# Altium PCB AMS1117 3_3V.PcbDoc
Units mil, origin at the board's own origin, x right, y up, seen from the top; angles counter-clockwise.
Board outline 2000 x 725 mil, 2 copper layers (Top Layer, Bottom Layer); 11 components, 8 nets, 49 pads, 4 vias.
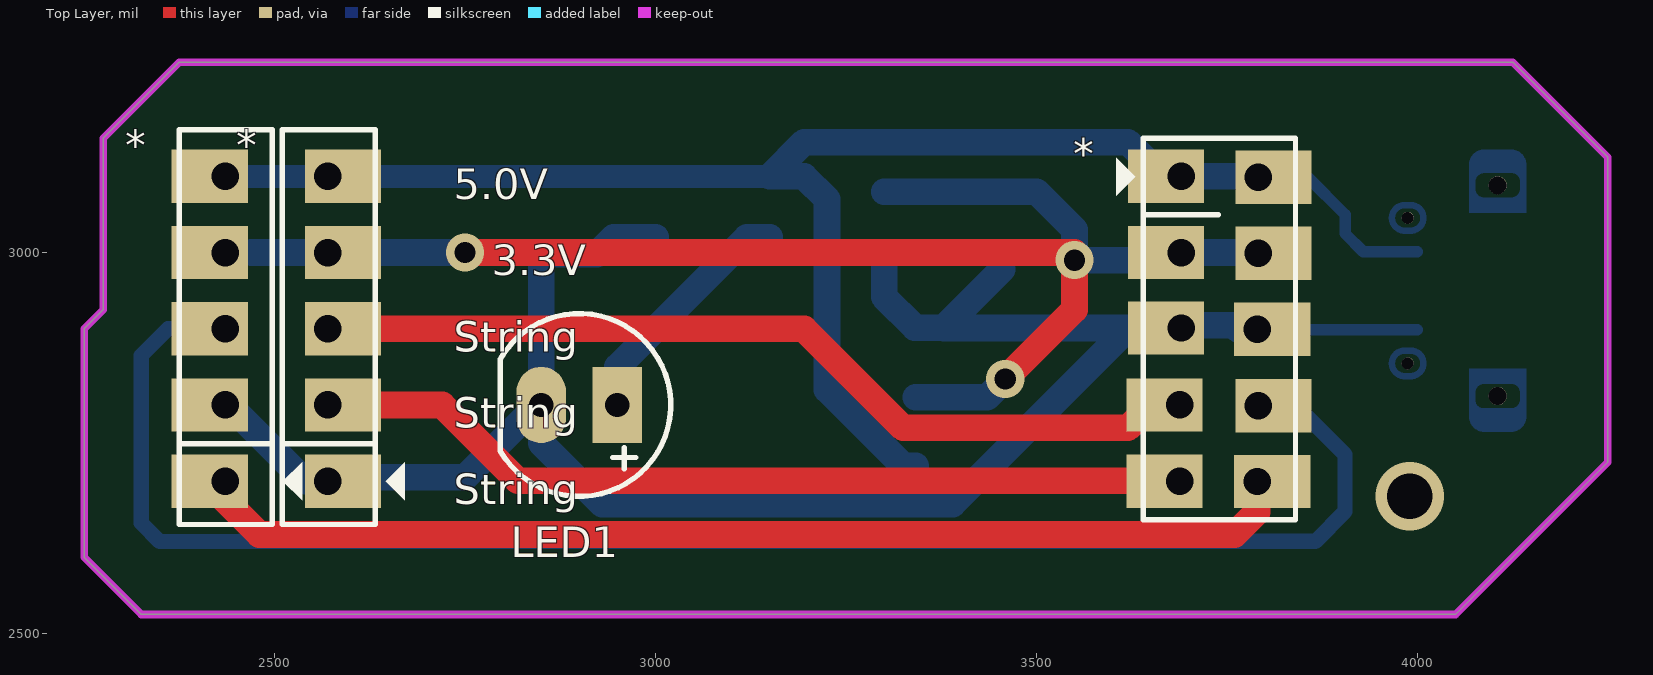
[diagram p0: Top Layer view]
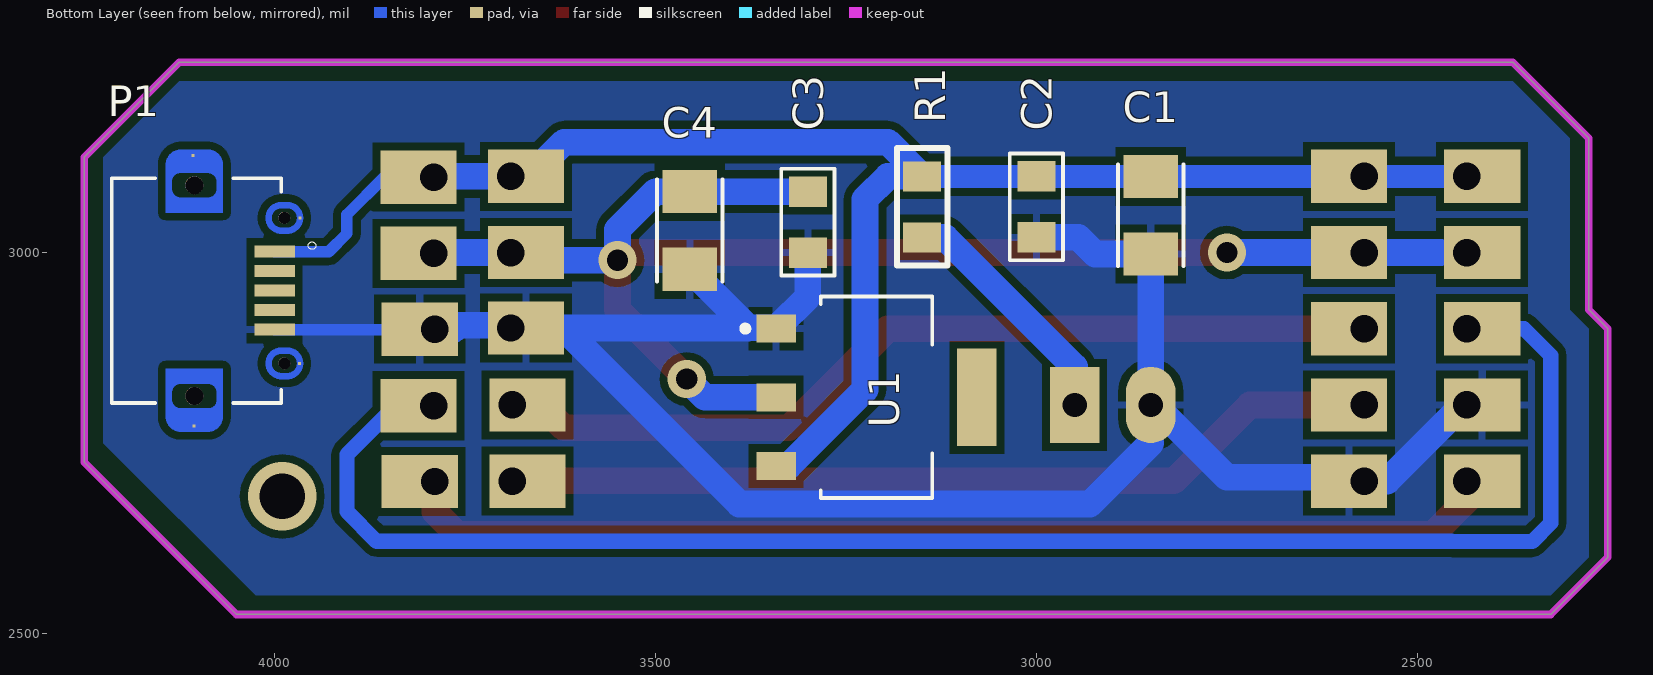
[diagram p1: Bottom Layer view, seen from below]
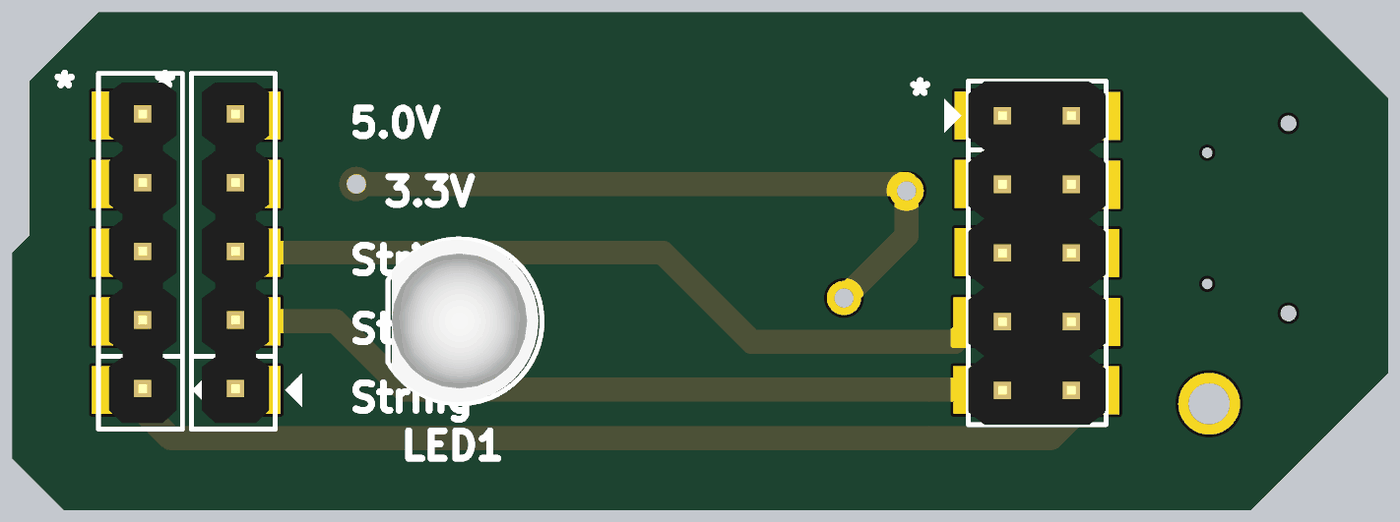
[diagram p2: 3D render of the assembled board from above, using the file's embedded part models]

## Layer stack, top to bottom
Top Solder: solder mask 0.4, Solder Resist, Dk 3.5
Top Layer: signal copper 1.4
Dielectric 1: dielectric 12.6, FR-4, Dk 4.8
Bottom Layer: signal copper 1.4
Bottom Solder: solder mask 0.4, Solder Resist, Dk 3.5

## Board outline
2325,2525 2250,2600 2250,2900 2275,2925 2275,3150 2375,3250 4125,3250 4250,3125 4250,2725 4050,2525

## Design rules (kind name [scope] priority, off if disabled: settings)
Clearance [All] p1: gap=10 ignorepadtopadclearanceinfootprint=FALSE except(0: Arc-Hole Track-Hole SMDPad-Hole THPad-Hole Via-Hole Fill-Hole Poly-Hole Region-Hole Text-Hole)
PolygonConnect [All] p1: connectstyle=Relief reliefconductorwidth=10 reliefentries=4 polygonreliefangle="90 Angle" airgapwidth=10
RoutingVias [All] p1: holewidth=28 width=50 viastyle="Through Hole" minholewidth=28 minwidth=50 maxholewidth=28 maxwidth=50
SolderMaskExpansion [All] p1: expansion=4
Width [All] p1: maxlimit=50 minlimit=15 preferedwidth=35 minimp=50.000000 maximp=50.000000 favimp=50.000000
30 further rules are at their usual default settings.

## Classes and differential pairs
component class "AMS1117 3_3V": * C1 C2 C3 C4 LED1 P1 R1 U1

## Components (designator, comment, footprint, x,y, rotation, side; value= is the part's Value field where it differs from the comment)
* "STM32" JP5#1 2570,2700 r90 top
* "STM8" JP5#2 2435,2700 r90 top
* "JP5X2" JP5X2 3689.5,3099.5 r270 top
C1 "C3216X5R1A106K160AB" CAPC3216X180 2850,3049.02 r270 bottom
C2 "2u2" 0805C-GENERIC 3000,3090 r270 bottom
C3 "2u2" 0805C-GENERIC 3300,3070 r270 bottom
C4 "C3216X5R1A106K160AB" CAPC3216X180 3455,3029.02 r270 bottom
LED1 "LED" LED-5-RED 2950,2800 r180 top
P1 "ZX62D-B-5P8" HRS_ZX62D-B-5P8 4000,2950 r270 bottom
R1 "R0805" "DIEN TRO 0805" 3150,3060 r90 bottom
U1 "AMS1117-3.3" SOT229P700X180-4N 3210,2810 r270 bottom

## Footprints (in the part's own frame and the unit in brackets; to place one, negate y for a bottom-side part, rotate by r counter-clockwise, add the part's x,y. Pads: shape width x height; smd on the part's side, far side on the other; paste and mask are expansions set on the pad)
0805C-GENERIC [mil] "CAPACITOR 0805"
  rect 40x50 smd: 1(-10,0) 2(70,0)
  silkscreen extent -40,-35 100,35, body extent -11,-25 70,25, height 26
CAPC3216X180 [mm]
  rect 1.44x1.82 smd: 1(-1.295,0) 2(1.295,0)
  silkscreen extent -1.7,-1.09 1.7,1.09
"DIEN TRO 0805" [mil] "Chip Resistor; Body 2.0 x 1.3 mm (LxW typ)"
  rect 39.37x50 smd: 1(-40,0) 2(40,0)
  silkscreen extent -77,-33 77,33, body extent -39,-25 39,25, height 31
HRS_ZX62D-B-5P8 [mm]
  rect 0.4x1.35 smd: 1(-1.3,0) 2(-0.65,0) 3(0,0) 4(0.65,0) 5(1.3,0)
  round 0.6 hole 0.6 unplated: None(-3.513,-2.675) None(3.513,-2.675)
  round 0.4 hole 0.4 unplated: None(-2.425,0.325) None(2.425,0.325)
  rect 0.1x0.1 smd: P1(-2.425,0.85) P2(2.425,0.837) P3(-4.513,-2.713) P6(4.513,-2.688)
  Top Layer region: 3.1,-2.675 2.6,-2.675 2.6,-1.725 4.213,-1.725 4.239,-1.726 4.265,-1.729 4.291,-1.733 4.317,-1.739 4.342,-1.745 4.367,-1.754 4.391,-1.763 4.415,-1.774 4.439,-1.785 4.461,-1.799 4.483,-1.813 4.504,-1.828 4.525,-1.845 4.544,-1.862 4.563,-1.881 4.58,-1.9 4.597,-1.921 4.612,-1.942 4.626,-1.964 4.64,-1.986 4.651,-2.01 4.662,-2.034 4.671,-2.058 4.68,-2.083 4.686,-2.108 4.692,-2.134 4.696,-2.16 4.699,-2.186 4.7,-2.212 4.7,-2.675 3.925,-2.675 3.925,-2.193 3.924,-2.178 3.923,-2.164 3.92,-2.15 3.917,-2.136 3.914,-2.122 3.909,-2.108 3.904,-2.095 3.898,-2.082 3.892,-2.069 3.885,-2.056 3.877,-2.044 3.868,-2.033 3.859,-2.021 3.85,-2.011 3.839,-2 3.829,-1.991 3.817,-1.982 3.806,-1.973 3.794,-1.965 3.781,-1.958 3.768,-1.952 3.755,-1.946 3.742,-1.941 3.728,-1.936 3.714,-1.933 3.7,-1.93 3.686,-1.927 3.672,-1.926 3.657,-1.925 3.392,-1.925 3.376,-1.926 3.361,-1.927 3.345,-1.93 3.33,-1.933 3.315,-1.937 3.3,-1.942 3.285,-1.948 3.271,-1.954 3.257,-1.961 3.243,-1.969 3.23,-1.978 3.217,-1.987 3.205,-1.997 3.193,-2.007 3.182,-2.018 3.172,-2.03 3.162,-2.042 3.153,-2.055 3.144,-2.068 3.136,-2.082 3.129,-2.096 3.123,-2.11 3.117,-2.125 3.112,-2.14 3.108,-2.155 3.105,-2.17 3.102,-2.186 3.101,-2.201 3.1,-2.217
  Top Layer region: -3.1,-2.675 -2.6,-2.675 -2.6,-3.625 -4.213,-3.625 -4.239,-3.624 -4.265,-3.621 -4.291,-3.617 -4.317,-3.611 -4.342,-3.605 -4.367,-3.596 -4.391,-3.587 -4.415,-3.576 -4.439,-3.565 -4.461,-3.551 -4.483,-3.537 -4.504,-3.522 -4.525,-3.505 -4.544,-3.488 -4.563,-3.469 -4.58,-3.45 -4.597,-3.429 -4.612,-3.408 -4.626,-3.386 -4.64,-3.364 -4.651,-3.34 -4.662,-3.316 -4.671,-3.292 -4.68,-3.267 -4.686,-3.242 -4.692,-3.216 -4.696,-3.19 -4.699,-3.164 -4.7,-3.138 -4.7,-2.675 -3.925,-2.675 -3.925,-3.157 -3.924,-3.172 -3.923,-3.186 -3.92,-3.2 -3.917,-3.214 -3.914,-3.228 -3.909,-3.242 -3.904,-3.255 -3.898,-3.268 -3.892,-3.281 -3.885,-3.294 -3.877,-3.306 -3.868,-3.317 -3.859,-3.329 -3.85,-3.339 -3.839,-3.35 -3.829,-3.359 -3.817,-3.368 -3.806,-3.377 -3.794,-3.385 -3.781,-3.392 -3.768,-3.398 -3.755,-3.404 -3.742,-3.409 -3.728,-3.414 -3.714,-3.417 -3.7,-3.42 -3.686,-3.423 -3.672,-3.424 -3.657,-3.425 -3.392,-3.425 -3.376,-3.424 -3.361,-3.423 -3.345,-3.42 -3.33,-3.417 -3.315,-3.413 -3.3,-3.408 -3.285,-3.402 -3.271,-3.396 -3.257,-3.389 -3.243,-3.381 -3.23,-3.372 -3.217,-3.363 -3.205,-3.353 -3.193,-3.343 -3.182,-3.332 -3.172,-3.32 -3.162,-3.308 -3.153,-3.295 -3.144,-3.282 -3.136,-3.268 -3.129,-3.254 -3.123,-3.24 -3.117,-3.225 -3.112,-3.21 -3.108,-3.195 -3.105,-3.18 -3.102,-3.164 -3.101,-3.149 -3.1,-3.133
  Top Layer region: 2.6,-3.625 4.213,-3.625 4.239,-3.624 4.265,-3.621 4.291,-3.617 4.317,-3.611 4.342,-3.605 4.367,-3.596 4.391,-3.587 4.415,-3.576 4.439,-3.565 4.461,-3.551 4.483,-3.537 4.504,-3.522 4.525,-3.505 4.544,-3.488 4.563,-3.469 4.58,-3.45 4.597,-3.429 4.612,-3.408 4.626,-3.386 4.64,-3.364 4.651,-3.34 4.662,-3.316 4.671,-3.292 4.68,-3.267 4.686,-3.242 4.692,-3.216 4.696,-3.19 4.699,-3.164 4.7,-3.138 4.7,-2.675 3.925,-2.675 3.925,-3.133 3.924,-3.149 3.923,-3.164 3.92,-3.18 3.917,-3.195 3.913,-3.21 3.908,-3.225 3.902,-3.24 3.896,-3.254 3.889,-3.268 3.881,-3.282 3.872,-3.295 3.863,-3.308 3.853,-3.32 3.843,-3.332 3.832,-3.343 3.82,-3.353 3.808,-3.363 3.795,-3.372 3.782,-3.381 3.768,-3.389 3.754,-3.396 3.74,-3.402 3.725,-3.408 3.71,-3.413 3.695,-3.417 3.68,-3.42 3.664,-3.423 3.649,-3.424 3.633,-3.425 3.392,-3.425 3.376,-3.424 3.361,-3.423 3.345,-3.42 3.33,-3.417 3.315,-3.413 3.3,-3.408 3.285,-3.402 3.271,-3.396 3.257,-3.389 3.243,-3.381 3.23,-3.372 3.217,-3.363 3.205,-3.353 3.193,-3.343 3.182,-3.332 3.172,-3.32 3.162,-3.308 3.153,-3.295 3.144,-3.282 3.136,-3.268 3.129,-3.254 3.123,-3.24 3.117,-3.225 3.112,-3.21 3.108,-3.195 3.105,-3.18 3.102,-3.164 3.101,-3.149 3.1,-3.133 3.1,-2.675 2.6,-2.675
  Top Layer region: -2.6,-1.725 -4.213,-1.725 -4.239,-1.726 -4.265,-1.729 -4.291,-1.733 -4.317,-1.739 -4.342,-1.745 -4.367,-1.754 -4.391,-1.763 -4.415,-1.774 -4.439,-1.785 -4.461,-1.799 -4.483,-1.813 -4.504,-1.828 -4.525,-1.845 -4.544,-1.862 -4.563,-1.881 -4.58,-1.9 -4.597,-1.921 -4.612,-1.942 -4.626,-1.964 -4.64,-1.986 -4.651,-2.01 -4.662,-2.034 -4.671,-2.058 -4.68,-2.083 -4.686,-2.108 -4.692,-2.134 -4.696,-2.16 -4.699,-2.186 -4.7,-2.212 -4.7,-2.675 -3.925,-2.675 -3.925,-2.217 -3.924,-2.201 -3.923,-2.186 -3.92,-2.17 -3.917,-2.155 -3.913,-2.14 -3.908,-2.125 -3.902,-2.11 -3.896,-2.096 -3.889,-2.082 -3.881,-2.068 -3.872,-2.055 -3.863,-2.042 -3.853,-2.03 -3.843,-2.018 -3.832,-2.007 -3.82,-1.997 -3.808,-1.987 -3.795,-1.978 -3.782,-1.969 -3.768,-1.961 -3.754,-1.954 -3.74,-1.948 -3.725,-1.942 -3.71,-1.937 -3.695,-1.933 -3.68,-1.93 -3.664,-1.927 -3.649,-1.926 -3.633,-1.925 -3.392,-1.925 -3.376,-1.926 -3.361,-1.927 -3.345,-1.93 -3.33,-1.933 -3.315,-1.937 -3.3,-1.942 -3.285,-1.948 -3.271,-1.954 -3.257,-1.961 -3.243,-1.969 -3.23,-1.978 -3.217,-1.987 -3.205,-1.997 -3.193,-2.007 -3.182,-2.018 -3.172,-2.03 -3.162,-2.042 -3.153,-2.055 -3.144,-2.068 -3.136,-2.082 -3.129,-2.096 -3.123,-2.11 -3.117,-2.125 -3.112,-2.14 -3.108,-2.155 -3.105,-2.17 -3.102,-2.186 -3.101,-2.201 -3.1,-2.217 -3.1,-2.675 -2.6,-2.675
  Top Layer region: 2.425,-0.1 2.425,-0.3 2.411,-0.3 2.384,-0.299 2.356,-0.296 2.329,-0.291 2.302,-0.286 2.276,-0.279 2.25,-0.27 2.224,-0.26 2.199,-0.249 2.174,-0.237 2.151,-0.223 2.128,-0.208 2.105,-0.192 2.084,-0.174 2.063,-0.156 2.044,-0.137 2.026,-0.116 2.008,-0.095 1.992,-0.072 1.977,-0.049 1.963,-0.026 1.951,-0.001 1.94,0.024 1.93,0.05 1.921,0.076 1.914,0.102 1.909,0.129 1.904,0.156 1.901,0.184 1.9,0.211 1.9,0.439 1.901,0.466 1.904,0.494 1.909,0.521 1.914,0.548 1.921,0.574 1.93,0.6 1.94,0.626 1.951,0.651 1.963,0.676 1.977,0.699 1.992,0.722 2.008,0.745 2.026,0.766 2.044,0.787 2.063,0.806 2.084,0.824 2.105,0.842 2.128,0.858 2.151,0.873 2.174,0.887 2.199,0.899 2.224,0.91 2.25,0.92 2.276,0.929 2.302,0.936 2.329,0.941 2.356,0.946 2.384,0.949 2.411,0.95 2.425,0.95 2.425,0.75 2.416,0.75 2.399,0.749 2.383,0.747 2.366,0.745 2.349,0.741 2.333,0.737 2.316,0.731 2.301,0.725 2.285,0.718 2.27,0.711 2.255,0.702 2.241,0.693 2.227,0.683 2.214,0.672 2.201,0.661 2.189,0.649 2.178,0.636 2.167,0.623 2.157,0.609 2.148,0.595 2.139,0.58 2.132,0.565 2.125,0.549 2.119,0.534 2.113,0.517 2.109,0.501 2.105,0.484 2.103,0.467 2.101,0.451 2.1,0.434 2.1,0.216 2.101,0.199 2.103,0.183 2.105,0.166 2.109,0.149 2.113,0.133 2.119,0.116 2.125,0.101 2.132,0.085 2.139,0.07 2.148,0.055 2.157,0.041 2.167,0.027 2.178,0.014 2.189,0.001 2.201,-0.011 2.214,-0.022 2.227,-0.033 2.241,-0.043 2.255,-0.052 2.27,-0.061 2.285,-0.068 2.301,-0.075 2.316,-0.081 2.333,-0.087 2.349,-0.091 2.366,-0.095 2.383,-0.097 2.399,-0.099 2.416,-0.1
  Top Layer region: 2.425,0.75 2.425,0.95 2.439,0.95 2.466,0.949 2.494,0.946 2.521,0.941 2.548,0.936 2.574,0.929 2.6,0.92 2.626,0.91 2.651,0.899 2.676,0.887 2.699,0.873 2.722,0.858 2.745,0.842 2.766,0.824 2.787,0.806 2.806,0.787 2.824,0.766 2.842,0.745 2.858,0.722 2.873,0.699 2.887,0.676 2.899,0.651 2.91,0.626 2.92,0.6 2.929,0.574 2.936,0.548 2.941,0.521 2.946,0.494 2.949,0.466 2.95,0.439 2.95,0.211 2.949,0.184 2.946,0.156 2.941,0.129 2.936,0.102 2.929,0.076 2.92,0.05 2.91,0.024 2.899,-0.001 2.887,-0.026 2.873,-0.049 2.858,-0.072 2.842,-0.095 2.824,-0.116 2.806,-0.137 2.787,-0.156 2.766,-0.174 2.745,-0.192 2.722,-0.208 2.699,-0.223 2.676,-0.237 2.651,-0.249 2.626,-0.26 2.6,-0.27 2.574,-0.279 2.548,-0.286 2.521,-0.291 2.494,-0.296 2.466,-0.299 2.439,-0.3 2.425,-0.3 2.425,-0.1 2.434,-0.1 2.451,-0.099 2.467,-0.097 2.484,-0.095 2.501,-0.091 2.517,-0.087 2.534,-0.081 2.549,-0.075 2.565,-0.068 2.58,-0.061 2.595,-0.052 2.609,-0.043 2.623,-0.033 2.636,-0.022 2.649,-0.011 2.661,0.001 2.672,0.014 2.683,0.027 2.693,0.041 2.702,0.055 2.711,0.07 2.718,0.085 2.725,0.101 2.731,0.116 2.737,0.133 2.741,0.149 2.745,0.166 2.747,0.183 2.749,0.199 2.75,0.216 2.75,0.434 2.749,0.451 2.747,0.467 2.745,0.484 2.741,0.501 2.737,0.517 2.731,0.534 2.725,0.549 2.718,0.565 2.711,0.58 2.702,0.595 2.693,0.609 2.683,0.623 2.672,0.636 2.661,0.649 2.649,0.661 2.636,0.672 2.623,0.683 2.609,0.693 2.595,0.702 2.58,0.711 2.565,0.718 2.549,0.725 2.534,0.731 2.517,0.737 2.501,0.741 2.484,0.745 2.467,0.747 2.451,0.749 2.434,0.75
  Top Layer region: -2.425,-0.1 -2.425,-0.3 -2.439,-0.3 -2.466,-0.299 -2.494,-0.296 -2.521,-0.291 -2.548,-0.286 -2.574,-0.279 -2.6,-0.27 -2.626,-0.26 -2.651,-0.249 -2.676,-0.237 -2.699,-0.223 -2.722,-0.208 -2.745,-0.192 -2.766,-0.174 -2.787,-0.156 -2.806,-0.137 -2.824,-0.116 -2.842,-0.095 -2.858,-0.072 -2.873,-0.049 -2.887,-0.026 -2.899,-0.001 -2.91,0.024 -2.92,0.05 -2.929,0.076 -2.936,0.102 -2.941,0.129 -2.946,0.156 -2.949,0.184 -2.95,0.211 -2.95,0.439 -2.949,0.466 -2.946,0.494 -2.941,0.521 -2.936,0.548 -2.929,0.574 -2.92,0.6 -2.91,0.626 -2.899,0.651 -2.887,0.676 -2.873,0.699 -2.858,0.722 -2.842,0.745 -2.824,0.766 -2.806,0.787 -2.787,0.806 -2.766,0.824 -2.745,0.842 -2.722,0.858 -2.699,0.873 -2.676,0.887 -2.651,0.899 -2.626,0.91 -2.6,0.92 -2.574,0.929 -2.548,0.936 -2.521,0.941 -2.494,0.946 -2.466,0.949 -2.439,0.95 -2.425,0.95 -2.425,0.75 -2.434,0.75 -2.451,0.749 -2.467,0.747 -2.484,0.745 -2.501,0.741 -2.517,0.737 -2.534,0.731 -2.549,0.725 -2.565,0.718 -2.58,0.711 -2.595,0.702 -2.609,0.693 -2.623,0.683 -2.636,0.672 -2.649,0.661 -2.661,0.649 -2.672,0.636 -2.683,0.623 -2.693,0.609 -2.702,0.595 -2.711,0.58 -2.718,0.565 -2.725,0.549 -2.731,0.534 -2.737,0.517 -2.741,0.501 -2.745,0.484 -2.747,0.467 -2.749,0.451 -2.75,0.434 -2.75,0.216 -2.749,0.199 -2.747,0.183 -2.745,0.166 -2.741,0.149 -2.737,0.133 -2.731,0.116 -2.725,0.101 -2.718,0.085 -2.711,0.07 -2.702,0.055 -2.693,0.041 -2.683,0.027 -2.672,0.014 -2.661,0.001 -2.649,-0.011 -2.636,-0.022 -2.623,-0.033 -2.609,-0.043 -2.595,-0.052 -2.58,-0.061 -2.565,-0.068 -2.549,-0.075 -2.534,-0.081 -2.517,-0.087 -2.501,-0.091 -2.484,-0.095 -2.467,-0.097 -2.451,-0.099 -2.434,-0.1
  Top Layer region: -2.425,0.75 -2.425,0.95 -2.411,0.95 -2.384,0.949 -2.356,0.946 -2.329,0.941 -2.302,0.936 -2.276,0.929 -2.25,0.92 -2.224,0.91 -2.199,0.899 -2.174,0.887 -2.151,0.873 -2.128,0.858 -2.105,0.842 -2.084,0.824 -2.063,0.806 -2.044,0.787 -2.026,0.766 -2.008,0.745 -1.992,0.722 -1.977,0.699 -1.963,0.676 -1.951,0.651 -1.94,0.626 -1.93,0.6 -1.921,0.574 -1.914,0.548 -1.909,0.521 -1.904,0.494 -1.901,0.466 -1.9,0.439 -1.9,0.211 -1.901,0.184 -1.904,0.156 -1.909,0.129 -1.914,0.102 -1.921,0.076 -1.93,0.05 -1.94,0.024 -1.951,-0.001 -1.963,-0.026 -1.977,-0.049 -1.992,-0.072 -2.008,-0.095 -2.026,-0.116 -2.044,-0.137 -2.063,-0.156 -2.084,-0.174 -2.105,-0.192 -2.128,-0.208 -2.151,-0.223 -2.174,-0.237 -2.199,-0.249 -2.224,-0.26 -2.25,-0.27 -2.276,-0.279 -2.302,-0.286 -2.329,-0.291 -2.356,-0.296 -2.384,-0.299 -2.411,-0.3 -2.425,-0.3 -2.425,-0.1 -2.416,-0.1 -2.399,-0.099 -2.383,-0.097 -2.366,-0.095 -2.349,-0.091 -2.333,-0.087 -2.316,-0.081 -2.301,-0.075 -2.285,-0.068 -2.27,-0.061 -2.255,-0.052 -2.241,-0.043 -2.227,-0.033 -2.214,-0.022 -2.201,-0.011 -2.189,0.001 -2.178,0.014 -2.167,0.027 -2.157,0.041 -2.148,0.055 -2.139,0.07 -2.132,0.085 -2.125,0.101 -2.119,0.116 -2.113,0.133 -2.109,0.149 -2.105,0.166 -2.103,0.183 -2.101,0.199 -2.1,0.216 -2.1,0.434 -2.101,0.451 -2.103,0.467 -2.105,0.484 -2.109,0.501 -2.113,0.517 -2.119,0.534 -2.125,0.549 -2.132,0.565 -2.139,0.58 -2.148,0.595 -2.157,0.609 -2.167,0.623 -2.178,0.636 -2.189,0.649 -2.201,0.661 -2.214,0.672 -2.227,0.683 -2.241,0.693 -2.255,0.702 -2.27,0.711 -2.285,0.718 -2.301,0.725 -2.316,0.731 -2.333,0.737 -2.349,0.741 -2.366,0.745 -2.383,0.747 -2.399,0.749 -2.416,0.75
  silkscreen extent -3.75,-5.42 3.75,1.38
JP5#1 [mil] "JP5"
  rect 70x100 hole 36 copper offset 0,-20: 1(0,0) 2(100,0) 3(200,0) 4(300,0) 5(400,0)
  silkscreen extent -57,-101 461,60, body extent -48,-53 448,45, height 323
JP5#2 [mil] "JP5"
  rect 70x100 hole 36 copper offset 0,20: 1(0,0) 2(100,0) 3(200,0) 4(300,0) 5(400,0)
  silkscreen extent -57,-101 461,60, body extent -48,-53 448,45, height 323
JP5X2 [mil]
  rect 70x100 hole 36 copper offset 0,-20: 1(-0.5,0.5) 2(99.5,0.5) 3(198.5,0.5) 4(299.5,-1.5) 5(399.5,-1.5)
  rect 70x100 hole 36 copper offset 0,20: 6(0.5,101.5) 7(100.5,101.5) 8(200,100) 9(300.5,101.5) 10(400,100)
  silkscreen extent -51,-85 450,151, body extent -50,-50 450,150, height 335
LED-5-RED [mil] "LED 2 PIN, 5 ly , Only colour,pin to pin 100mil"
  rect 65x100 hole 32: 1(0,0)
  oval 65x100 hole 32: 2(100,0)
  silkscreen extent -70,-120 154,120, body extent -65,-119 149,118, height 339
SOT229P700X180-4N [mm]
  rect 0.93x1.31 smd: 1(-2.29,-3.345) 2(0,-3.345) 3(2.29,-3.345)
  rect 3.24x1.31 smd: 4(0,3.345)
  silkscreen extent -3.36,-4.47 3.36,1.86

## Part data
* *: library part JP5
C1 C4: "C Series 1206 10 uF 10 V ±10 % Tolerance X5R SMT Multilayer Ceramic Capacitor"
C2 C3: library part 0805C-2U2-6V3-X5R-PAN, "CAPACITOR 0805 CERAMIC"
LED1: "LED Single colour Green and Red"
P1: "SMD+DIP Micro USB; MICRO-B-SMD"
R1: "Resistor SMD 0805"
U1: "Sot223/Pkg 1-Amp 3.3-Volt Low Drop Out Voltage Regulatator"

## Via types
v1: diameter 50, hole 28, Top Layer to Bottom Layer, 3 vias
v2: diameter 90/90 (per signal layer), hole 60, Top Layer to Bottom Layer, 1 vias

## Nets (pads, with @x,y where several pads share a name; then routed paths per layer and width w, separated by ;. In a path a pad name is that pad's centre, name@x,y a point inside that pad or via, vN(x,y) a via of type N, cw(c..) or ccw(c..) an arc to the next point about the centre after c; other vN are vias at no path point)
3.3V: *.2@3690,3000 *.4@2435,3000 *.4@2570,3000 *.7 C3.1 C4.1 U1.2 | length 1957.2
  Top Layer w35: v1(2750,3000) v1@3550,3000 ; v1(3459,2834) 3550,2925 v1(3550,2990)
  Bottom Layer w15: v1(3550,2990) v1@3550,3000
  Bottom Layer w35: 2470,3000 v1(2750,3000) ; C3.1 C4.1 3500,3080 3550,3030 v1@3550,3000 ; U1.2 3435,2810 v1(3459,2834) ; v1(3550,2990) 3680,2990 3690,3000 3790,3000 *.7
5.0V: *.1@3690,3100 *.5@2435,3100 *.5@2570,3100 *.6 C1.1 C2.1 P1.1 R1.2 U1.3 | length 2153.5
  Bottom Layer w15: *.6 3856,3099 3905,3050 3905,3025 3928.82,3001.18 P1.1
  Bottom Layer w30: *.5@2435,3100 2570,3100 C1.1 C2.1 R1.2
  Bottom Layer w35: U1.3 3325.16,2719.84 3225,2820 3225,3070 3195,3100 R1.2 3195,3145 3620,3145 3665,3100 3690,3100 3790,3100 *.6
GND: *.1@2570,2700 *.2@2435,2800 *.3@3690,2901 *.8 C1.2 C2.2 C3.2 C4.2 LED1.2 P1.5 U1.1 | length 2744
  Bottom Layer w15: *.3@3660,2906 *.3@3661.5,2904.5 ; *.8@3765.46,2898.54 P1.5@4000,2898.54
  Bottom Layer w20: LED1.2@2845,2800 LED1.2 2850,2750 ; 3370,2901.5 3378.47,2901.5
  Bottom Layer w35: *.2@2415,2800 2435,2800 2440,2800 2540,2700 *.1@2570,2700 ; *.1@2570,2695 2580,2705 2750,2705 LED1.2@2845,2800 ; 2850,2750 2930,2670 3390,2670 *.3@3621,2901 ; LED1.2 C1.2 2923.03,2998.03 2945,3020 C2.2 ; C3.2 3300,2941.85 3340.35,2901.5 3370,2901.5 ; C4.2 3378.47,2901.5 3378.97,2901 *.3@3621,2901 ; *.3@3621.5,2901.5 *.3@3621,2901 ; *.3@3661.5,2904.5 3759.5,2904.5 *.8@3765.46,2898.54 ; *.3@3690,2901 *.3@3621,2901
NetLED1_1: LED1.1 R1.1 | length 320.4
  Bottom Layer w15: LED1.1 LED1.1@2950,2815
  Bottom Layer w35: LED1.1@2950,2815 2950,2850 3120,3020 R1.1
RST: *.1@2435,2700 *.10 | length 1457.2
  Top Layer w35: *.1@2412.5,2697.5 2480,2630 3760,2630 3789.5,2659.5 *.10
SWCLK: *.2@2570,2800 *.5@3688,2700 | length 1129.2
  Top Layer w35: *.2@2570,2800 2720,2800 2819.5,2700.5 *.5@3658,2700.5
SWDIO: *.3@2570,2900 *.4@3688,2800 | length 1177
  Top Layer w35: *.3@2570,2900 3195,2900 3325,2770 3620,2770 3650.5,2800.5 *.4@3680.5,2800.5
SWIM: *.3@2435,2900 *.9 | length 2083.6
  Bottom Layer w20: *.3@2415,2900 2360,2900 2325,2865 2325,2645 2349.22,2620.78 2454.78,2620.78 2455,2621 3866,2621 3905,2660 3905,2735 *.9@3850,2790
pads on no net: P1.2 P1.3 P1.4 P1.None P1.P1 P1.P2 P1.P3 P1.P6 U1.4
copper on no net:
  other v2: 3990,2680

## Polygon pours and split planes (outlines as drawn)
GND on Bottom Layer "GND_L02_P004" (solid, pour order 4): 2275,2725 2275,2625 2275,2600 2325,2550 4000,2550 4025,2550 4225,2750 4225,3125 4125,3225 2440,3225 2375,3225 2300,3150 2300,2925 2275,2900

## Keep-outs
Keep-Out Layer:
  the board outline again, w10

## Silkscreen, mask and mechanical layers (free items; w line width, h text height)
Top Overlay:
  text "5.0V" at 2735,3070 h40
  text "3.3V" at 2785,2970 h40
  text "String" at 2735,2870 h40
  text "String" at 2735,2770 h40
  text "String" at 2735,2670 h40